# Altium PCB ADJ5V3.3V12V_PCB_2021-07-20.pcbdoc
Units mm, origin at the board's own origin, x right, y up, seen from the top; angles counter-clockwise.
Board outline 99.7 x 98 mm, 2 copper layers (Top Layer, Bottom Layer); 44 components, 20 nets, 128 pads, 209 vias.
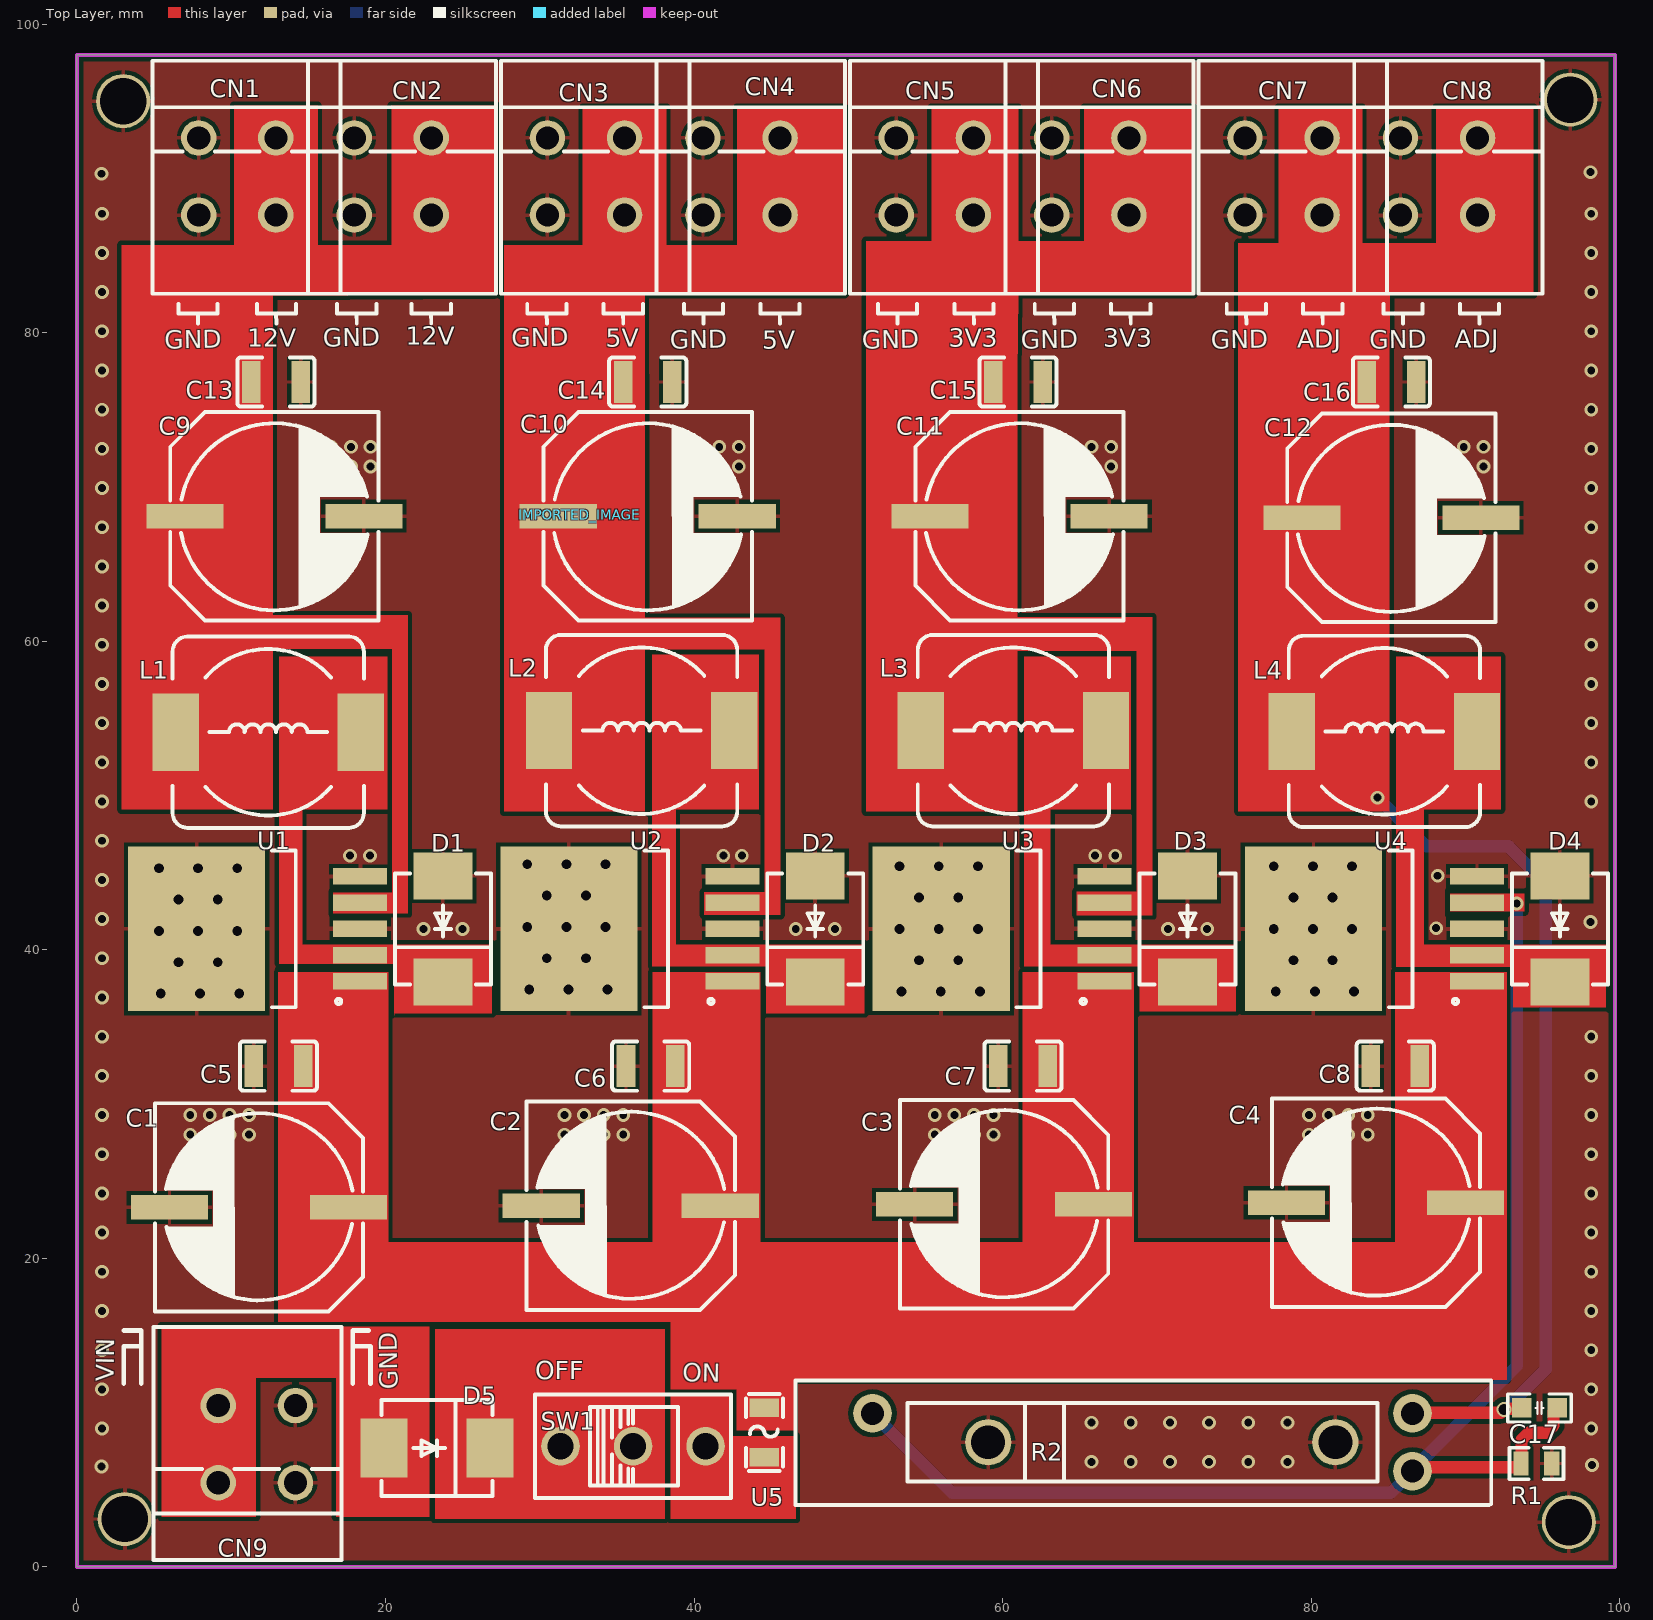
[diagram p0: Top Layer view]
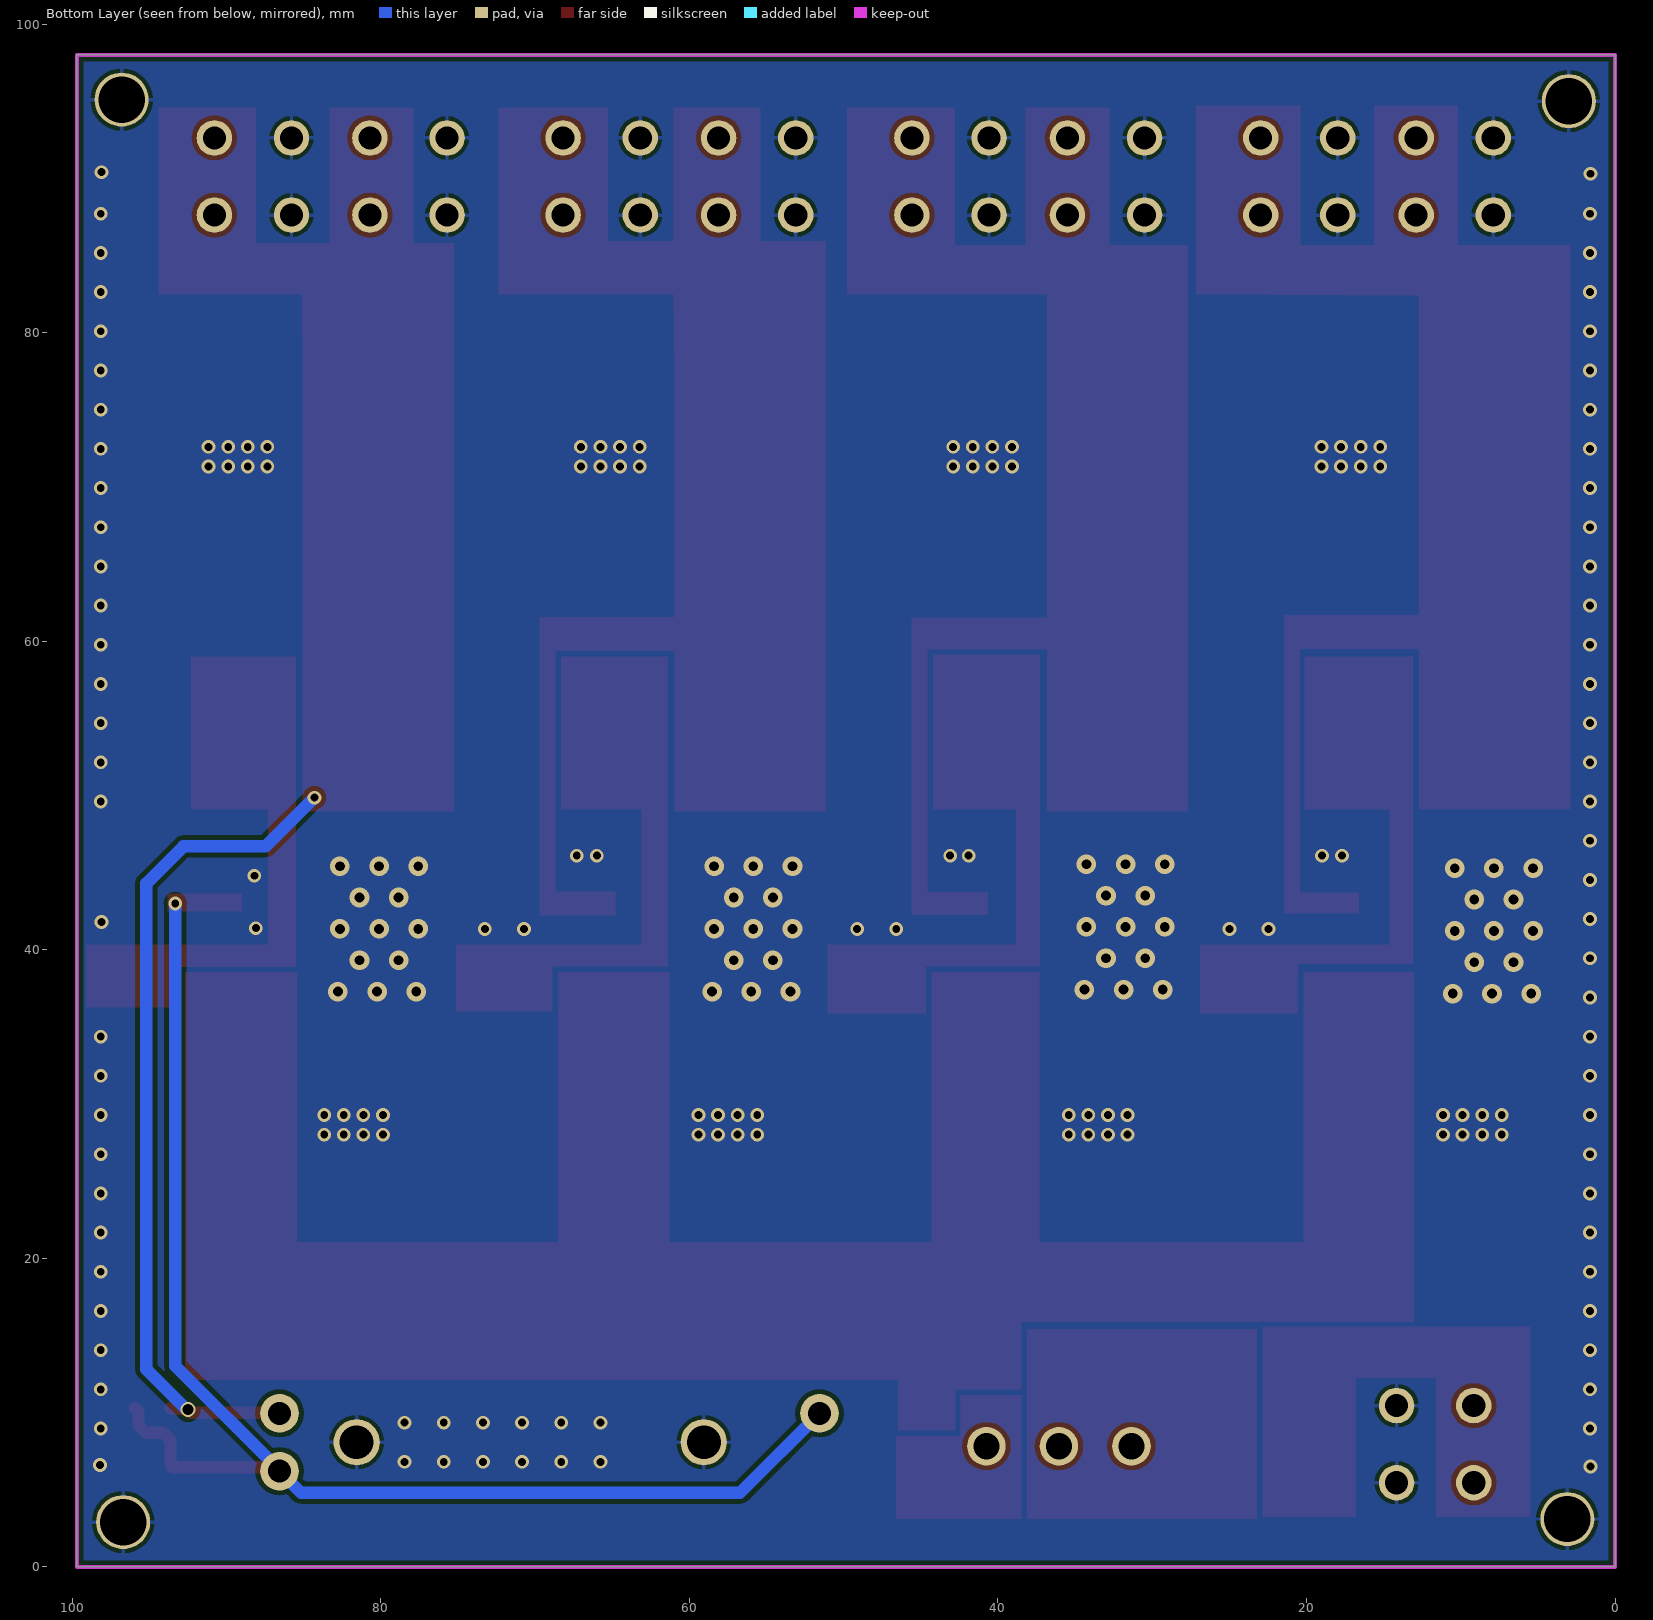
[diagram p1: Bottom Layer view, seen from below]

## Layer stack, top to bottom
Top Solder: solder mask 0.0102, Solder Resist, Dk 3.5
Top Layer: signal copper 0.0356
Dielectric1: dielectric 0.32, FR-4, Dk 4.8
Bottom Layer: signal copper 0.0356
Bottom Solder: solder mask 0.0102, Solder Resist, Dk 3.5

## Board outline
0,90.394 0,98 99.7,98 99.7,0 0,0

## Design rules (kind name [scope] priority, off if disabled: settings)
Clearance Clearance_1 [OnLayer('Bottom Layer')] p1: gap=0.3 ignorepadtopadclearanceinfootprint=FALSE
Clearance [OnLayer('Top Layer')] p2: gap=0.3 ignorepadtopadclearanceinfootprint=FALSE
ComponentClearance [All] p1: gap=0 collisioncheckmode=3 verticalgap=0 showdistances=FALSE
PolygonConnect [InNet('GND')] p1: thpad.connectstyle=Relief thpad.reliefconductorwidth=0.254 thpad.reliefentries=4 thpad.polygonreliefangle="90 Angle" thpad.airgapwidth=0.254 smdpad.connectstyle=Relief smdpad.reliefconductorwidth=0.254 smdpad.reliefentries=4 smdpad.polygonreliefangle="90 Angle" smdpad.airgapwidth=0.254 via.connectstyle=Direct via.reliefconductorwidth=0.254 via.reliefentries=4 via.polygonreliefangle="90 Angle" via.airgapwidth=0.254
RoutingVias [All] p1: holewidth=0.711 width=1 viastyle="Through Hole" minholewidth=0.5 minwidth=0.8 maxholewidth=3 maxwidth=3.5
SolderMaskExpansion [All] p1: expansion=0.102 istentingtop=FALSE
Width [All] p1: maxlimit=2 minlimit=0.3 preferedwidth=0.8
29 further rules are at their usual default settings.

## Components (designator, comment, footprint, x,y, rotation, side; value= is the part's Value field where it differs from the comment)
C1 "470uF" CAP-SMD_BD12.5-L13.0-W13.0-FD 11.8,23.3 r180 top
C2 "470uF" CAP-SMD_BD12.5-L13.0-W13.0-FD 35.9,23.4 r180 top
C3 "470uF" CAP-SMD_BD12.5-L13.0-W13.0-FD 60.1,23.5 r180 top
C4 "470uF" CAP-SMD_BD12.5-L13.0-W13.0-FD 84.2,23.6 r180 top
C5 "100nF" C1210 13.06,32.461 r0 top
C6 "100nF" C1210 37.19,32.461 r0 top
C7 "100nF" C1210 61.32,32.461 r0 top
C8 "100nF" C1210 85.45,32.461 r0 top
C9 "470uF" CAP-SMD_BD12.5-L13.0-W13.0-FD 12.8,68.1 r0 top
C10 "470uF" CAP-SMD_BD12.5-L13.0-W13.0-FD 37,68.1 r0 top
C11 "470uF" CAP-SMD_BD12.5-L13.0-W13.0-FD 61.1,68.1 r0 top
C12 "470uF" CAP-SMD_BD12.5-L13.0-W13.0-FD 85.2,68 r0 top
C13 "100nF" C1210 12.9,76.8 r180 top
C14 "100nF" C1210 37,76.8 r180 top
C15 "100nF" C1210 61,76.8 r180 top
C16 "100nF" C1210 85.2,76.8 r180 top
C17 "Comment" "C 0805_M" 94.8,10.3 r0 top
CN1 "KF243-5.0-2P" CONN-TH_P5.00_KF243-5.0-2P 10.393,90.119 r0 top
CN2 "KF243-5.0-2P" CONN-TH_P5.00_KF243-5.0-2P 20.473,90.119 r0 top
CN3 "KF243-5.0-2P" CONN-TH_P5.00_KF243-5.0-2P 32.999,90.119 r0 top
CN4 "KF243-5.0-2P" CONN-TH_P5.00_KF243-5.0-2P 43.079,90.119 r0 top
CN5 "KF243-5.0-2P" CONN-TH_P5.00_KF243-5.0-2P 55.605,90.119 r0 top
CN6 "KF243-5.0-2P" CONN-TH_P5.00_KF243-5.0-2P 65.685,90.119 r0 top
CN7 "KF243-5.0-2P" CONN-TH_P5.00_KF243-5.0-2P 78.211,90.119 r0 top
CN8 "KF243-5.0-2P" CONN-TH_P5.00_KF243-5.0-2P 88.291,90.119 r0 top
CN9 "KF243-5.0-2P" CONN-TH_P5.00_KF243-5.0-2P 11.663,7.95 r180 top
D1 "SS56 SMC" SMC_L7.1-W6.2-LS8.1-FD 23.728,41.351 r270 top
D2 "SS56 SMC" SMC_L7.1-W6.2-LS8.1-FD 47.858,41.351 r270 top
D3 "SS56 SMC" SMC_L7.1-W6.2-LS8.1-FD 71.988,41.351 r270 top
D4 "SS56 SMC" SMC_L7.1-W6.2-LS8.1-FD 96.118,41.351 r270 top
D5 "SS56 SMC" SMC_L7.1-W6.2-LS8.1-FD 23.347,7.696 r0 top
IMPORTED_IMAGE "Comment" IMPORTED_IMAGE 32.6,68.2 r0 top
L1 "68uH" CDRH124 12.4,54.1 r0 top
L2 "47uH" CDRH124 36.6,54.2 r0 top
L3 "47uH" CDRH124 60.7,54.2 r0 top
L4 "68uH" CDRH124 84.75,54.151 r0 top
R1 "1k" R0805 94.6,6.7 r0 top
R2 "ALPS" RES-ADJ-TH_RS30111A602N 69.067,8.077 r180 top
SW1 "SS-12D10L9" SW-TH_SS-12D10L9 36.047,7.823 r0 top
U1 "LM2596S-12/TR_C462059" TO-263-5_L10.6-W9.6-P1.70-LS15.9-BR 13.06,41.351 r0 top
U2 "LM2596S-5.0/TR_C459077" TO-263-5_L10.6-W9.6-P1.70-LS15.9-BR 37.19,41.351 r0 top
U3 "LM2596S-3.3/TR_C340930" TO-263-5_L10.6-W9.6-P1.70-LS15.9-BR 61.32,41.351 r0 top
U4 "LM2596S-ADJ/TR_C340933" TO-263-5_L10.6-W9.6-P1.70-LS15.9-BR 85.45,41.351 r0 top
U5 "AF1206F3.00TM" F1206 44.556,8.712 r270 top

## Footprints (in the part's own frame and the unit in brackets; to place one, negate y for a bottom-side part, rotate by r counter-clockwise, add the part's x,y. Pads: shape width x height; smd on the part's side, far side on the other; paste and mask are expansions set on the pad)
C1210 [mm]
  rect 1.2x2.7 smd: 1(-1.6,0) 2(1.6,0)
  silkscreen extent -2.5,-1.6 2.5,1.6
"C 0805_M" [mil] "无极性贴片电容"
  rect 50x50 smd: 1(-45,0) 2(45,0)
  silkscreen extent -81,-36 81,36, body extent -39,-24 39,24, height 20
CAP-SMD_BD12.5-L13.0-W13.0-FD [mm]
  rect 5x1.6 smd: 1(-5.8,0) 2(5.8,0)
  silkscreen extent -6.75,-6.75 6.75,6.75
CDRH124 [mm] "12*12*4.5mm（长宽高）"
  rect 3x5 smd: 1(-6,0) 2(6,0)
  silkscreen extent -6.2,-6.2 6.2,6.2, body extent -6,-6 6,6, height 4.55
CONN-TH_P5.00_KF243-5.0-2P [mm]
  round 2.3 hole 1.5: 1(-2.5,-2.5) 1(-2.5,2.5) 2(2.5,-2.5) 2(2.5,2.5)
  silkscreen extent -5.5,-7.6 6.7,7.5
F1206 [mm]
  rect 1.2x1.9 smd: 1(-1.6,0) 2(1.6,0)
  silkscreen extent -2.5,-1.2 2.5,1.2
IMPORTED_IMAGE [mm]
R0805 [mm]
  rect 1x1.55 smd: 1(-1,0) 2(1,0)
  silkscreen extent -1.75,-1.02 1.75,1.02
RES-ADJ-TH_RS30111A602N [mm]
  round 2.5 hole 1.5: 1(-17.5,-1.875) 2(-17.5,1.875) 3(17.5,-1.875)
  round 3 hole 2.2: 4(-12.5,0) 5(10,0)
  silkscreen extent -22.61,-4 22.48,4.06
SMC_L7.1-W6.2-LS8.1-FD [mm]
  rect 3.03x3.82 smd: 1(-3.435,0) 2(3.435,0)
  silkscreen extent -3.6,-3.11 3.6,3.11
SW-TH_SS-12D10L9 [mm]
  round 2.5 hole 1.7: 1(-4.7,0) 2(0,0) 3(4.7,0)
  silkscreen extent -6.35,-3.35 6.35,3.35
TO-263-5_L10.6-W9.6-P1.70-LS15.9-BR [mm]
  rect 3.5x1.069 smd: 1(5.3,-3.404) 2(5.3,-1.702) 3(5.3,0) 4(5.3,1.702) 5(5.3,3.404)
  rect 8.89x10.66 smd: 6(-5.3,0)
  silkscreen extent -0.41,-5.08 4.07,5.08

## Free pads (board coordinates)
  round 3.5 hole 3: 6(3,95) 7(3.1,3.1) 8(96.7,2.9) 9(96.8,95.1)

## Via types
v1: diameter 0.889, hole 0.508, Top Layer to Bottom Layer, 156 vias
v2: diameter 1.27, hole 0.635, Top Layer to Bottom Layer, 52 vias
v3: diameter 1, hole 0.711, Top Layer to Bottom Layer, 1 vias

## Nets (pads, with @x,y where several pads share a name; then routed paths per layer and width w, separated by ;. In a path a pad name is that pad's centre, name@x,y a point inside that pad or via, vN(x,y) a via of type N, cw(c..) or ccw(c..) an arc to the next point about the centre after c; other vN are vias at no path point)
3V3: C11.1 C15.2 CN5.2 CN6.2 L3.1 U3.4
5V: C10.1 C14.2 CN3.2 CN4.2 L2.1 U2.4
12V: C9.1 C13.2 CN1.2 CN2.2 L1.1 U1.4
ADJ: C12.1 C16.2 C17.1 CN7.2 CN8.2 L4.1 R2.1 | length 55.9
  Top Layer w0.8: R2.1@86.636,9.979 92.279,9.979 v3(92.5,10.2) 92.538,10.238 93.595,10.238 C17.1
  Top Layer w0.889: R2.1 86.848,9.952 R2.1@86.848,9.922
  Bottom Layer w0.8: v1(84.307,49.86) 87.467,46.7 92.8,46.7 95.2,44.3 95.2,12.8 92.6,10.2 v3(92.5,10.2)
CN9_2: CN9.2 D5.1
FB: C17.2 R1.1 R2.2 R2.3 U4.4 | length 89.9
  Top Layer w0.8: R2.2 86.816,6.451 93.5,6.451 93.6,6.551 R1.1 93.631,6.731 93.631,8.231 94.1,8.7 95.239,8.7 95.708,9.169 95.708,10.065 C17.2
  Bottom Layer w0.8: R2.3 56.719,4.8 85.165,4.8 R2.2 86.567,6.267 93.324,13.024 v1(93.324,43.002)
GND: C1.2 C2.2 C3.2 C4.2 C5.1 C6.1 C7.1 C8.1 C9.2 C10.2 C11.2 C12.2 C13.1 C14.1 C15.1 C16.1 CN1.1 CN2.1 CN3.1 CN4.1 CN5.1 CN6.1 CN7.1 CN8.1 CN9.1 D1.1 D2.1 D3.1 D4.1 pad.6 pad.7 pad.8 pad.9 R1.2 R2.4 R2.5 U1.3 U1.5 U1.6 U2.3 U2.5 U2.6 U3.3 U3.5 U3.6 U4.3 U4.5 U4.6
  other v1: 1.6,6.5 98.2,6.6 65.765,6.807 68.305,6.807 70.845,6.807 73.385,6.807 75.925,6.807 78.465,6.807 1.63,8.966 98.15,8.966 65.765,9.347 68.305,9.347 70.845,9.347 73.385,9.347 75.925,9.347 78.465,9.347 1.63,11.506 98.15,11.506 1.63,14.046 98.15,14.046 1.63,16.586 98.15,16.586 1.63,19.126 98.15,19.126 1.63,21.666 98.15,21.666 1.63,24.206 98.15,24.206 1.63,26.746 98.15,26.746 7.345,28.016 8.615,28.016 9.885,28.016 11.155,28.016 31.602,28.016 32.872,28.016 34.142,28.016 35.412,28.016 55.605,28.016 56.875,28.016 58.145,28.016 59.415,28.016 79.862,28.016 81.132,28.016 82.402,28.016 83.672,28.016 1.63,29.286 7.345,29.286 8.615,29.286 9.885,29.286 11.155,29.286 31.602,29.286 32.872,29.286 34.142,29.286 35.412,29.286 55.605,29.286 56.875,29.286 58.145,29.286 59.415,29.286 79.862,29.286 81.132,29.286 82.402,29.286 83.672,29.286 98.15,29.286 1.63,31.826 98.15,31.826 1.63,34.366 98.15,34.366 1.63,36.906 1.63,39.446 22.458,41.351 24.998,41.351 46.588,41.351 49.128,41.351 70.718,41.351 73.258,41.351 88.1,41.4 98.1,41.8 1.63,41.986 1.63,44.526 88.2,44.8 17.7,46.1 19,46.1 41.9,46.1 43.1,46.1 66,46.1 67.3,46.1 1.63,47.066 1.63,49.606 98.15,49.606 1.63,52.146 98.15,52.146 1.63,54.686 98.15,54.686 1.63,57.226 98.15,57.226 1.63,59.766 98.15,59.766 1.63,62.306 98.15,62.306 1.63,64.846 98.15,64.846 1.63,67.386 98.15,67.386 1.63,69.926 98.15,69.926 15.219,71.323 16.489,71.323 17.759,71.323 19.029,71.323 39.095,71.323 40.365,71.323 41.635,71.323 42.905,71.323 63.225,71.323 64.495,71.323 65.765,71.323 67.035,71.323 87.355,71.323 88.625,71.323 89.895,71.323 91.165,71.323 1.63,72.466 98.15,72.466 15.219,72.593 16.489,72.593 17.759,72.593 19.029,72.593 39.095,72.593 40.365,72.593 41.635,72.593 42.905,72.593 63.225,72.593 64.495,72.593 65.765,72.593 67.035,72.593 87.355,72.593 88.625,72.593 89.895,72.593 91.165,72.593 1.63,75.006 98.15,75.006 1.63,77.546 98.15,77.546 1.63,80.086 98.15,80.086 1.63,82.626 98.15,82.626 1.63,85.166 98.15,85.166 1.63,87.706 98.15,87.706 1.6,90.3 98.1,90.4
  other v2: 5.44,37.16 7.98,37.16 10.52,37.16 53.446,37.287 55.986,37.287 58.526,37.287 77.703,37.287 80.243,37.287 82.783,37.287 29.316,37.414 31.856,37.414 34.396,37.414 6.583,39.192 9.123,39.192 54.589,39.319 57.129,39.319 78.846,39.319 81.386,39.319 30.459,39.446 32.999,39.446 5.313,41.224 7.853,41.224 10.393,41.224 53.319,41.351 55.859,41.351 58.399,41.351 77.576,41.351 80.116,41.351 82.656,41.351 29.189,41.478 31.729,41.478 34.269,41.478 6.583,43.256 9.123,43.256 54.589,43.383 57.129,43.383 78.846,43.383 81.386,43.383 30.459,43.51 32.999,43.51 5.313,45.288 7.853,45.288 10.393,45.288 53.319,45.415 55.859,45.415 58.399,45.415 77.576,45.415 80.116,45.415 82.656,45.415 29.189,45.542 31.729,45.542 34.269,45.542
L2_2: D2.2 L2.2 U2.2
L3_2: D3.2 L3.2 U3.2
L4_2: D4.2 L4.2 U4.2
S$1825: 
S$4801: 
S$4803: 
S$5291: 
S$5293: 
SW1_1: D5.2 SW1.1 SW1.2
SW1_3: SW1.3 U5.2
U1_2: D1.2 L1.2 U1.2
U4_4: 
VIN: C1.1 C2.1 C3.1 C4.1 C5.2 C6.2 C7.2 C8.2 U1.1 U2.1 U3.1 U4.1 U5.1

## Polygon pours and split planes (outlines as drawn)
GND on Top Layer "GND_L01_P000" (solid, remove dead copper, pour order 0): 0,98 0,0 99.7,0 99.7,98
GND on Bottom Layer "GND_L02_P001" (solid, remove dead copper, pour order 1): 0,98 99.7,98 99.7,0 0,0 0,98

## Keep-outs
Keep-Out Layer:
  the board outline again, w0.254

## Other copper
Top Layer:
  region net SW1_1: 23.22,3.124 23.22,15.4 38.1,15.4 38.1,3.251 38.1,3.124 27.538,3.124
  region net CN9_2: 11.6,12.268 11.6,3.251 5.5,3.251 5.5,15.57 22.839,15.57 22.839,3.251 17.251,3.251 16.8,3.251 16.8,12.268
  region net SW1_3: 38.5,3.124 38.5,11.125 42.397,11.125 42.397,8.458 46.588,8.458 46.588,3.124
  region net VIN: 13.06,15.9 13.06,38.557 20.172,38.557 20.172,37.414 20.172,24.333 20.172,21.031 37.317,21.031 37.317,38.557 44.302,38.557 44.302,37.414 44.302,24.5 44.302,21.031 61.32,21.031 61.32,38.557 68.5,38.557 68.5,24.46 68.5,21.031 85.45,21.031 85.45,38.557 92.689,38.557 92.689,37.414 92.689,24.46 92.689,12.141 46.588,12.141 46.461,12.141 46.461,8.839 46.588,8.839 46.461,8.839 42.778,8.839 42.778,11.506 38.5,11.506 38.5,15.9
  region net U1_2: 16.489,39.1 16.489,40.335 26.903,40.335 26.903,35.89 20.553,35.89 20.553,35.763 20.553,35.89 20.553,39.1
  region net L2_2: 40.619,40.335 51.033,40.335 51.033,35.89 44.683,35.89 44.683,38.938 40.619,38.938
  region net L3_2: 64.622,40.335 75.1,40.335 75.1,36.015 68.9,36.015 68.9,38.938 64.622,38.938
  region net L4_2: 87.2,40.335 99.1,40.335 99.1,36.271 93.1,36.271 93.1,38.9 87.2,38.9
  region net U1_2: 13.1,39.1 13.1,59.004 20.12,59.004 20.12,49.098 14.6,49.098 14.6,40.335 16.489,40.335 16.489,39.1
  region net L2_2: 40.619,38.938 37.306,38.938 37.296,59.131 44.2,59.131 44.2,49.098 38.8,49.098 38.8,40.335 40.619,40.335
  region net L3_2: 64.622,38.938 61.4,38.938 61.4,59.004 68.3,59.004 68.3,49.098 63.1,49.098 63.1,40.335 64.622,40.335
  region net L4_2: 87.3,38.9 85.5,38.9 85.5,59.004 92.3,59.004 92.3,49.098 87.3,49.098
  region net 12V: 2.9,49.098 12.679,49.098 12.679,77.419 2.9,77.419
  region net 12V: 16.6,42.367 21.442,42.367 21.442,47.066 21.442,61.671 12.6,61.671 12.6,59.512 20.426,59.512 20.426,43.7 16.6,43.7
  region net 5V: 40.647,43.471 40.647,42.261 45.6,42.261 45.6,46.9 45.6,61.505 36.8,61.505 36.8,59.478 44.584,59.478 44.584,43.725 40.647,43.725
  region net 3V3: 64.8,42.24 69.702,42.24 69.702,46.939 69.702,61.544 60.9,61.544 60.9,59.385 68.686,59.385 68.686,43.764 64.8,43.764
  region net 5V: 27.7,48.971 36.809,48.971 36.809,77.292 27.7,77.292
  region net 3V3: 51.16,48.971 60.939,48.971 60.939,77.292 51.16,77.292
  region net ADJ: 75.29,48.971 85.069,48.971 85.069,77.419 80.243,77.419 75.29,77.419
  region net FB: 89.006,42.494 93.8,42.494 93.8,43.637 89.006,43.637
  region net 12V: 2.9,77.419 2.9,85.674 10.2,85.674 10.2,94.691 15.6,94.691 15.6,85.674 20.4,85.674 20.4,94.691 27.157,94.691 27.157,82.499 12.704,82.397 12.679,77.419
  region net 5V: 27.7,77.174 27.7,81.991 27.7,85.674 32.8,85.674 32.8,94.564 38.2,94.564 38.2,85.674 42.8,85.674 42.8,94.564 49.763,94.564 49.763,82.499 36.8,82.499 36.8,77.29
  region net 3V3: 51.16,77.292 51.16,85.928 55.4,85.928 55.4,94.564 61,94.564 61,85.928 65.3,85.928 65.3,94.564 72.369,94.564 72.369,82.499 61,82.499 60.939,77.292
  region net ADJ: 75.29,77.419 75.29,85.8 77.9,85.8 77.9,94.564 83.3,94.564 83.3,85.8 88.1,85.8 88.1,94.564 94.4,94.564 94.4,82.499 85.1,82.499 85.069,77.419

## Silkscreen, mask and mechanical layers (free items; w line width, h text height)
Top Overlay:
  lines w0.254: 6.583,81.864 6.583,81.229 9.123,81.229 9.123,81.864 ; 7.838,81.229 7.853,80.594 ; 11.663,81.864 11.663,81.229 14.203,81.229 14.203,81.864 ; 12.918,81.229 12.933,80.594 ; 16.87,81.864 16.87,81.229 19.41,81.229 19.41,81.864 ; 18.125,81.229 18.14,80.594 ; 21.696,81.864 21.696,81.229 24.236,81.229 24.236,81.864 ; 22.951,81.229 22.966,80.594 ; 29.189,81.864 29.189,81.229 31.729,81.229 31.729,81.864 ; 30.444,81.229 30.459,80.594 ; 34.142,81.864 34.142,81.229 36.682,81.229 36.682,81.864 ; 35.397,81.229 35.412,80.594 ; 39.349,81.864 39.349,81.229 41.889,81.229 41.889,81.864 ; 40.604,81.229 40.619,80.594 ; 44.302,81.864 44.302,81.229 46.842,81.229 46.842,81.864 ; 45.557,81.229 45.572,80.594 ; 51.922,81.864 51.922,81.229 54.462,81.229 54.462,81.864 ; 53.177,81.229 53.192,80.594 ; 56.875,81.864 56.875,81.229 59.415,81.229 59.415,81.864 ; 58.13,81.229 58.145,80.594 ; 62.082,81.864 62.082,81.229 64.622,81.229 64.622,81.864 ; 63.337,81.229 63.352,80.594 ; 67.035,81.864 67.035,81.229 69.575,81.229 69.575,81.864 ; 68.29,81.229 68.305,80.594 ; 74.528,81.864 74.528,81.229 77.068,81.229 77.068,81.864 ; 75.783,81.229 75.798,80.594 ; 79.481,81.864 79.481,81.229 82.021,81.229 82.021,81.864 ; 80.736,81.229 80.751,80.594 ; 84.688,81.864 84.688,81.229 87.228,81.229 87.228,81.864 ; 85.943,81.229 85.958,80.594 ; 89.641,81.864 89.641,81.229 92.181,81.229 92.181,81.864 ; 90.896,81.229 90.911,80.594
  lines w0.305: 3.027,11.887 3.027,14.3 4.17,14.3 ; 3.027,15.316 4.17,15.316 4.17,14.3 ; 4.17,11.887 4.17,14.3 ; 17.886,11.887 17.886,14.3 19.029,14.3 19.029,11.887 ; 17.886,14.173 17.886,15.316 18.902,15.316
  text "12V" at 21.315,78.816 h2.03
  text "12V" at 11.028,78.689 h2.03
  text "GND" at 15.981,78.689 h2.03 r1
  text "GND" at 28.173,78.689 h2.03 r1
  text "5V" at 34.269,78.689 h2.03
  text "3V3" at 56.494,78.689 h2.03
  text "3V3" at 66.527,78.689 h2.03
  text "ADJ" at 79.1,78.623 h2.03
  text "ADJ" at 89.3,78.623 h2.03
  text "GND" at 5.694,78.562 h2.03 r1
  text "GND" at 38.46,78.562 h2.03 r1
  text "5V" at 44.429,78.562 h2.03
  text "GND" at 50.906,78.562 h2.03 r1
  text "GND" at 61.193,78.562 h2.03 r1
  text "GND" at 73.512,78.562 h2.03 r1
  text "GND" at 83.799,78.562 h2.03 r1
  text "VIN" at 2.773,12.014 h2.03 r89
  text "OFF" at 29.697,11.76 h2.03
  text "ON" at 39.222,11.633 h2.03 r359
  text "GND" at 21.188,11.506 h2.03 r91
Top Solder:
  drawing of 1840 lines, arcs and shapes, not listed